# Altium PCB PCB1.PcbDoc (part 4 of 8)
Units mil, origin at the board's own origin, x right, y up, seen from the top; angles counter-clockwise.
Board outline 3820 x 2600 mil, 2 copper layers (Top Layer, Bottom Layer); 88 components, 130 nets, 566 pads, 113 vias.
Unrouted connection lines stored in the file: 16.
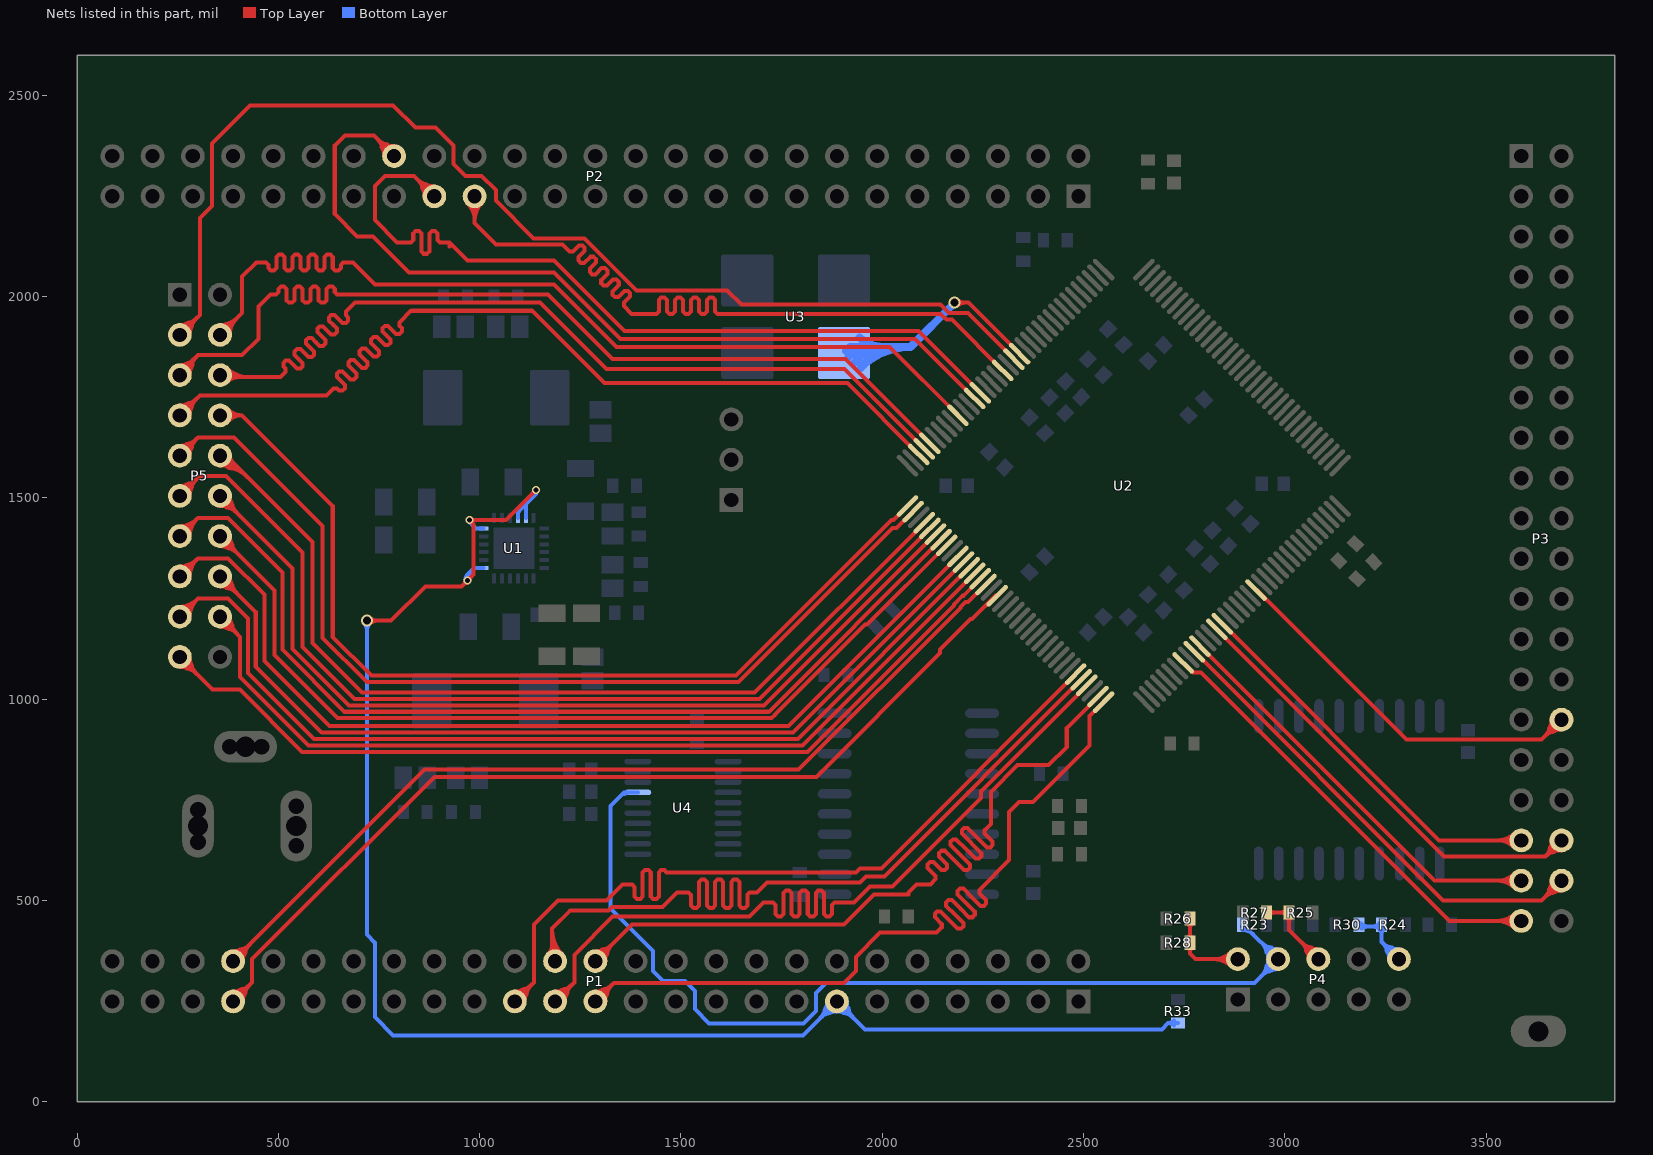
[diagram p4: the nets of this part, all layers, seen from the top]

## Via types
v1: diameter 30, hole 20, Top Layer to Bottom Layer, 74 vias
v2: diameter 20, hole 12, Top Layer to Bottom Layer, 36 vias
v3: diameter 17.72, hole 11.81, Top Layer to Bottom Layer, 3 vias

## Nets (pads, with @x,y where several pads share a name; then routed paths per layer and width w, separated by ;. In a path a pad name is that pad's centre, name@x,y a point inside that pad or via, vN(x,y) a via of type N, cw(c..) or ccw(c..) an arc to the next point about the centre after c; other vN are vias at no path point) (continued)
ADC2_D11: P3.30 U2.129 | length 1655.3
  Top Layer w10: U2.129@2928.5,1271.1 2931.58,1271.1 3302.68,900 3638.19,900 P3.30@3687.4,949.21 ; U2.129@2949.38,1249.31 cw(c2949.38,1239.68) 2956.19,1246.49 ; U2.129@2949.38,1249.31 cw(c2949.38,1239.68) 2956.19,1246.49 ; U2.129@2949.38,1249.31 cw(c2949.38,1239.68) 2956.19,1246.49 ; 3645.53,907.34 cw(c3687.4,865.47) P3.30@3687.4,924.68 ; 3645.53,907.34 ccw(c3603.66,949.21) P3.30@3662.87,949.21 ; 3645.53,907.34 cw(c3687.4,865.47) P3.30@3687.4,924.68 ; 3645.53,907.34 ccw(c3603.66,949.21) P3.30@3662.87,949.21 ; 3645.53,907.34 ccw(c3603.66,949.21) P3.30@3662.87,949.21 ; 3645.53,907.34 cw(c3687.4,865.47) P3.30@3687.4,924.68 ; 3656.89,926.86 cw(c3694.02,916.92) P3.30@3686.3,954.57 ; 3656.89,926.86 cw(c3694.02,916.92) P3.30@3686.3,954.57 ; 3656.89,926.86 cw(c3694.02,916.92) P3.30@3686.3,954.57 ; 3662.6,924.41 cw(c3687.4,899.61) P3.30@3687.4,934.68 ; 3662.6,924.41 ccw(c3637.8,949.21) P3.30@3672.87,949.21 ; 3662.6,924.41 cw(c3687.4,899.61) P3.30@3687.4,934.68 ; 3662.6,924.41 ccw(c3637.8,949.21) P3.30@3672.87,949.21 ; 3662.6,924.41 ccw(c3637.8,949.21) P3.30@3672.87,949.21 ; 3662.6,924.41 cw(c3687.4,899.61) P3.30@3687.4,934.68 ; 3665.05,918.7 ccw(c3655.11,955.83) P3.30@3692.76,948.11 ; 3665.05,918.7 ccw(c3655.11,955.83) P3.30@3692.76,948.11 ; 3665.05,918.7 ccw(c3655.11,955.83) P3.30@3692.76,948.11
ADC2_D12: P3.35 U2.123 | length 1409.7
  Top Layer w10: U2.123@2844.98,1187.58 3383.35,649.21 P3.35@3587.4,649.21 ; 3528.19,649.21 cw(c3528.19,590) P3.35@3570.06,631.87 ; 3528.19,649.21 ccw(c3528.19,708.43) P3.35@3570.06,666.56 ; 3528.19,649.21 cw(c3528.19,590) P3.35@3570.06,631.87 ; 3528.19,649.21 ccw(c3528.19,708.43) P3.35@3570.06,666.56 ; 3528.19,649.21 ccw(c3528.19,708.43) P3.35@3570.06,666.56 ; 3528.19,649.21 cw(c3528.19,590) P3.35@3570.06,631.87 ; 3552.33,649.21 cw(c3552.33,614.14) P3.35@3577.13,638.94 ; 3552.33,649.21 ccw(c3552.33,684.28) P3.35@3577.13,659.48 ; 3552.33,649.21 cw(c3552.33,614.14) P3.35@3577.13,638.94 ; 3552.33,649.21 ccw(c3552.33,684.28) P3.35@3577.13,659.48 ; 3552.33,649.21 ccw(c3552.33,684.28) P3.35@3577.13,659.48 ; 3552.33,649.21 cw(c3552.33,614.14) P3.35@3577.13,638.94
ADC2_D13: P3.36 U2.122 | length 1788.7
  Top Layer w10: U2.122@2831.06,1173.63 3396.01,608.68 3646.87,608.68 P3.36@3687.4,649.21 ; 3646.88,608.69 cw(c3685.55,570.01) P3.36@3686.83,624.69 ; 3646.88,608.69 ccw(c3608.2,647.36) P3.36@3662.88,648.64 ; 3646.88,608.69 cw(c3685.55,570.01) P3.36@3686.83,624.69 ; 3646.88,608.69 ccw(c3608.2,647.36) P3.36@3662.88,648.64 ; 3646.88,608.69 ccw(c3608.2,647.36) P3.36@3662.88,648.64 ; 3646.88,608.69 cw(c3685.55,570.01) P3.36@3686.83,624.69 ; 3657.2,625.25 cw(c3696.05,615.8) P3.36@3686.03,654.51 ; 3657.2,625.25 cw(c3696.05,615.8) P3.36@3686.03,654.51 ; 3657.2,625.25 cw(c3696.05,615.8) P3.36@3686.03,654.51 ; 3663.4,625.21 cw(c3686.31,602.3) P3.36@3687.06,634.69 ; 3663.4,625.21 ccw(c3640.49,648.12) P3.36@3672.88,648.87 ; 3663.4,625.21 cw(c3686.31,602.3) P3.36@3687.06,634.69 ; 3663.4,625.21 ccw(c3640.49,648.12) P3.36@3672.88,648.87 ; 3663.4,625.21 ccw(c3640.49,648.12) P3.36@3672.88,648.87 ; 3663.4,625.21 cw(c3686.31,602.3) P3.36@3687.06,634.69 ; 3663.44,619.01 ccw(c3653.99,657.86) P3.36@3692.7,647.84 ; 3663.44,619.01 ccw(c3653.99,657.86) P3.36@3692.7,647.84 ; 3663.44,619.01 ccw(c3653.99,657.86) P3.36@3692.7,647.84
ADC2_D14: P3.37 U2.119 | length 1483.8
  Top Layer w10: U2.119@2789.3,1131.9 3372,549.21 P3.37@3587.4,549.21 ; 3528.19,549.21 cw(c3528.19,490) P3.37@3570.06,531.87 ; 3528.19,549.21 ccw(c3528.19,608.43) P3.37@3570.06,566.56 ; 3528.19,549.21 cw(c3528.19,490) P3.37@3570.06,531.87 ; 3528.19,549.21 ccw(c3528.19,608.43) P3.37@3570.06,566.56 ; 3528.19,549.21 ccw(c3528.19,608.43) P3.37@3570.06,566.56 ; 3528.19,549.21 cw(c3528.19,490) P3.37@3570.06,531.87 ; 3552.33,549.21 cw(c3552.33,514.14) P3.37@3577.13,538.94 ; 3552.33,549.21 ccw(c3552.33,584.28) P3.37@3577.13,559.48 ; 3552.33,549.21 cw(c3552.33,514.14) P3.37@3577.13,538.94 ; 3552.33,549.21 ccw(c3552.33,584.28) P3.37@3577.13,559.48 ; 3552.33,549.21 ccw(c3552.33,584.28) P3.37@3577.13,559.48 ; 3552.33,549.21 cw(c3552.33,514.14) P3.37@3577.13,538.94
ADC2_D15: P3.38 U2.118 | length 1888
  Top Layer w10: U2.118@2775.38,1117.98 3393.37,500 3638.19,500 P3.38@3687.4,549.21 ; 3645.53,507.34 cw(c3687.4,465.47) P3.38@3687.4,524.68 ; 3645.53,507.34 ccw(c3603.66,549.21) P3.38@3662.87,549.21 ; 3645.53,507.34 cw(c3687.4,465.47) P3.38@3687.4,524.68 ; 3645.53,507.34 ccw(c3603.66,549.21) P3.38@3662.87,549.21 ; 3645.53,507.34 ccw(c3603.66,549.21) P3.38@3662.87,549.21 ; 3645.53,507.34 cw(c3687.4,465.47) P3.38@3687.4,524.68 ; 3656.89,526.86 cw(c3694.02,516.92) P3.38@3686.3,554.57 ; 3656.89,526.86 cw(c3694.02,516.92) P3.38@3686.3,554.57 ; 3656.89,526.86 cw(c3694.02,516.92) P3.38@3686.3,554.57 ; 3662.6,524.41 cw(c3687.4,499.61) P3.38@3687.4,534.68 ; 3662.6,524.41 ccw(c3637.8,549.21) P3.38@3672.87,549.21 ; 3662.6,524.41 cw(c3687.4,499.61) P3.38@3687.4,534.68 ; 3662.6,524.41 ccw(c3637.8,549.21) P3.38@3672.87,549.21 ; 3662.6,524.41 ccw(c3637.8,549.21) P3.38@3672.87,549.21 ; 3662.6,524.41 cw(c3687.4,499.61) P3.38@3687.4,534.68 ; 3665.05,518.7 ccw(c3655.11,555.83) P3.38@3692.76,548.11 ; 3665.05,518.7 ccw(c3655.11,555.83) P3.38@3692.76,548.11 ; 3665.05,518.7 ccw(c3655.11,555.83) P3.38@3692.76,548.11
ADC2_OF: P3.39 U2.116 | length 1578.8
  Top Layer w10: U2.116@2747.55,1090.15 2771.41,1066.28 2791.96,1066.28 3409.03,449.21 P3.39@3587.4,449.21 ; U2.116@2769.07,1069.91 ccw(c2777.82,1078.66) 2777.82,1066.28 ; U2.116@2769.07,1069.91 ccw(c2777.82,1078.66) 2777.82,1066.28 ; U2.116@2769.07,1069.91 ccw(c2777.82,1078.66) 2777.82,1066.28 ; 3528.19,449.21 cw(c3528.19,390) P3.39@3570.06,431.87 ; 3528.19,449.21 ccw(c3528.19,508.43) P3.39@3570.06,466.56 ; 3528.19,449.21 cw(c3528.19,390) P3.39@3570.06,431.87 ; 3528.19,449.21 ccw(c3528.19,508.43) P3.39@3570.06,466.56 ; 3528.19,449.21 ccw(c3528.19,508.43) P3.39@3570.06,466.56 ; 3528.19,449.21 cw(c3528.19,390) P3.39@3570.06,431.87 ; 3552.33,449.21 cw(c3552.33,414.14) P3.39@3577.13,438.94 ; 3552.33,449.21 ccw(c3552.33,484.28) P3.39@3577.13,459.48 ; 3552.33,449.21 cw(c3552.33,414.14) P3.39@3577.13,438.94 ; 3552.33,449.21 ccw(c3552.33,484.28) P3.39@3577.13,459.48 ; 3552.33,449.21 ccw(c3552.33,484.28) P3.39@3577.13,459.48 ; 3552.33,449.21 cw(c3552.33,414.14) P3.39@3577.13,438.94
CLK_OSC: U2.52 U3.3 | length 1770
  Top Layer w10: v1(2180,1985) 2214.6,1985 U2.52@2341.1,1858.5 ; v1@2187.07,1977.93 cw(c2204.14,1960.86) 2204.14,1985 ; v1@2187.07,1977.93 cw(c2204.14,1960.86) 2204.14,1985 ; v1@2187.07,1977.93 cw(c2204.14,1960.86) 2204.14,1985 ; v1@2187.07,1992.07 ccw(c2204.14,2009.14) 2204.14,1985 ; v1@2187.07,1992.07 ccw(c2204.14,2009.14) 2204.14,1985 ; v1@2187.07,1992.07 ccw(c2204.14,2009.14) 2204.14,1985
  Bottom Layer w20: U3.3@1910,1865 1920,1875 2070,1875 ; v1(2180,1985) 2070,1875 ; U3.3@1915.79,1849.58 cw(c1975.71,1791.67) 1975.71,1875 ; U3.3@1915.79,1849.58 cw(c1975.71,1791.67) 1975.71,1875 ; U3.3@1915.79,1849.58 cw(c1975.71,1791.67) 1975.71,1875 ; U3.3@1930.17,1835.68 cw(c2022.85,1746.11) 2022.85,1875 ; U3.3@1930.17,1835.68 cw(c2022.85,1746.11) 2022.85,1875 ; U3.3@1930.17,1835.68 cw(c2022.85,1746.11) 2022.85,1875 ; U3.3@1943.89,1898.89 ccw(c2001.57,1956.57) 2001.57,1875 ; U3.3@1943.89,1898.89 ccw(c2001.57,1956.57) 2001.57,1875 ; U3.3@1943.89,1898.89 ccw(c2001.57,1956.57) 2001.57,1875 ; U3.3@1944.55,1821.78 cw(c2069.99,1700.56) 2069.99,1875 ; U3.3@1944.55,1821.78 cw(c2069.99,1700.56) 2069.99,1875 ; U3.3@1944.55,1821.78 cw(c2069.99,1700.56) 2069.99,1875
DIO_CLK: P5.3 U2.53 | length 3541.8
  Top Layer w10: P5.3@255,1905 305,1955 305,2195 335,2225 335,2380 430,2475 785,2475 840,2420 890,2420 935,2375 935,2330 965,2300 1005,2300 1040,2265 1040,2239.3 1134.3,2145 1260,2145 1390,2015 1615,2015 1650,1980 2145,1980 2166,1959 2212.76,1959 U2.53@2327.18,1844.58 ; P5.3@249.64,1906.1 cw(c287.3,1898.39) 277.35,1935.52 ; P5.3@249.64,1906.1 cw(c287.3,1898.39) 277.35,1935.52 ; P5.3@249.64,1906.1 cw(c287.3,1898.39) 277.35,1935.52 ; P5.3@255,1919.53 ccw(c255,1954.6) 279.8,1929.8 ; P5.3@255,1919.53 ccw(c255,1954.6) 279.8,1929.8 ; P5.3@255,1919.53 ccw(c255,1954.6) 279.8,1929.8 ; P5.3@255,1929.53 ccw(c255,1988.74) 296.87,1946.87 ; P5.3@255,1929.53 ccw(c255,1988.74) 296.87,1946.87 ; P5.3@255,1929.53 ccw(c255,1988.74) 296.87,1946.87 ; P5.3@256.1,1899.64 ccw(c248.39,1937.3) 285.52,1927.35 ; P5.3@256.1,1899.64 ccw(c248.39,1937.3) 285.52,1927.35 ; P5.3@256.1,1899.64 ccw(c248.39,1937.3) 285.52,1927.35 ; P5.3@269.53,1905 cw(c304.6,1905) 279.8,1929.8 ; P5.3@269.53,1905 cw(c304.6,1905) 279.8,1929.8 ; P5.3@269.53,1905 cw(c304.6,1905) 279.8,1929.8 ; P5.3@279.53,1905 cw(c338.74,1905) 296.87,1946.87 ; P5.3@279.53,1905 cw(c338.74,1905) 296.87,1946.87 ; P5.3@279.53,1905 cw(c338.74,1905) 296.87,1946.87
DIO_D0: P5.4 U2.63 | length 2555.3
  Top Layer w10: P5.4@355,1905 410,1960 410,2050 445,2085 469,2085 475,2079 475,2071 481,2065 489,2065 495,2071 495,2099 501,2105 509,2105 515,2099 515,2071 521,2065 529,2065 535,2071 535,2099 541,2105 549,2105 555,2099 555,2071 561,2065 569,2065 575,2071 575,2099 581,2105 589,2105 595,2099 595,2071 601,2065 609,2065 615,2071 615,2099 621,2105 629,2105 635,2099 635,2071 641,2065 649,2065 655,2071 655,2079 661,2085 685,2085 740,2030 1185,2030 1340,1875 2018.37,1875 U2.63@2187.99,1705.38 ; P5.4@355,1919.53 ccw(c355,1954.6) 379.8,1929.8 ccw(c404.6,1905) P5.4@369.53,1905 ; P5.4@355,1929.53 ccw(c355,1988.74) 396.87,1946.87 ccw(c438.74,1905) P5.4@379.53,1905
DIO_D1: P5.5 U2.68 | length 3017
  Top Layer w10: P5.5@247.5,1812.5 257.5,1812.5 300,1855 ; U2.68@2118.39,1635.79 1909.18,1845 1330,1845 1170,2005 646,2005 640,2011 640,2019 634,2025 626,2025 620,2019 620,1991 614,1985 606,1985 600,1991 600,2019 594,2025 586,2025 580,2019 580,1991 574,1985 566,1985 560,1991 560,2019 554,2025 546,2025 540,2019 540,1991 534,1985 526,1985 520,1991 520,2019 514,2025 506,2025 500,2019 500,2011 494,2005 480,2005 450,1975 450,1895 410,1855 300,1855 ; P5.5@249.57,1805.69 cw(c284.07,1801.32) 275.07,1834.9 ; P5.5@249.57,1805.69 cw(c284.07,1801.32) 275.07,1834.9 ; P5.5@249.57,1805.69 cw(c284.07,1801.32) 275.07,1834.9 ; P5.5@255,1829.53 ccw(c255,1876.67) 288.34,1843.34 ; P5.5@255,1829.53 ccw(c255,1876.67) 288.34,1843.34 ; P5.5@255,1829.53 ccw(c255,1876.67) 288.34,1843.34 ; P5.5@256.51,1799.74 ccw(c244.69,1840.79) 286.02,1829.98 ; P5.5@256.51,1799.74 ccw(c244.69,1840.79) 286.02,1829.98 ; P5.5@256.51,1799.74 ccw(c244.69,1840.79) 286.02,1829.98 ; P5.5@269.53,1805.09 cw(c315.77,1805.37) 283.07,1838.07 ; P5.5@269.53,1805.09 cw(c315.77,1805.37) 283.07,1838.07 ; P5.5@269.53,1805.09 cw(c315.77,1805.37) 283.07,1838.07 ; P5.5@279.53,1805.15 cw(c349.42,1805.58) 300,1855 ; P5.5@279.53,1805.15 cw(c349.42,1805.58) 300,1855 ; P5.5@279.53,1805.15 cw(c349.42,1805.58) 300,1855
DIO_D2: P5.6 U2.69 | length 2428.2
  Top Layer w10: P5.6@360,1800 505,1800 517.83,1812.83 517.83,1821.31 512.17,1826.97 512.17,1835.46 517.83,1841.11 526.31,1841.11 546.11,1821.31 554.6,1821.31 560.25,1826.97 560.25,1835.46 540.46,1855.25 540.46,1863.74 546.11,1869.4 554.6,1869.4 574.4,1849.6 582.88,1849.6 588.54,1855.25 588.54,1863.74 568.74,1883.54 568.74,1892.02 574.4,1897.68 582.88,1897.68 592.78,1887.78 602.68,1877.88 611.17,1877.88 616.82,1883.54 616.82,1892.02 597.02,1911.82 597.02,1920.31 602.68,1925.97 611.17,1925.97 630.97,1906.17 639.45,1906.17 645.11,1911.82 645.11,1920.31 635.21,1930.21 625.31,1940.11 625.31,1948.59 630.97,1954.25 639.45,1954.25 659.25,1934.45 667.74,1934.45 673.39,1940.11 673.39,1948.59 667.73,1954.25 667.73,1962.74 690,1985 1150,1985 1315,1820 1906.34,1820 U2.69@2104.47,1621.87 ; P5.6@365.27,1815.27 ccw(c402.14,1852.14) 402.14,1800 ccw(c402.14,1757.86) P5.6@372.34,1787.66 ; P5.6@372.34,1822.34 ccw(c426.29,1876.29) 426.29,1800
DIO_D3: P5.7 U2.70 | length 3146.4
  Top Layer w10: P5.7@255,1705 305,1755 620,1755 636.97,1771.97 645.46,1771.97 651.11,1766.31 659.6,1766.31 665.25,1771.97 665.25,1780.46 645.46,1800.25 645.46,1808.74 651.11,1814.4 659.6,1814.4 679.4,1794.6 687.88,1794.6 693.54,1800.25 693.54,1808.74 673.74,1828.54 673.74,1837.02 679.4,1842.68 687.88,1842.68 697.78,1832.78 707.68,1822.88 716.17,1822.88 721.82,1828.54 721.82,1837.02 702.02,1856.82 702.02,1865.31 707.68,1870.97 716.17,1870.97 735.97,1851.17 744.45,1851.17 750.11,1856.82 750.11,1865.31 740.21,1875.21 730.31,1885.11 730.31,1893.59 735.97,1899.25 744.45,1899.25 764.25,1879.45 772.74,1879.45 778.39,1885.11 778.39,1893.59 758.59,1913.39 758.59,1921.88 764.25,1927.53 772.74,1927.53 792.53,1907.74 801.02,1907.74 806.68,1913.39 806.68,1921.88 801.02,1927.53 801.02,1936.02 830,1965 1130,1965 1310,1785 1913.5,1785 U2.70@2090.55,1607.95 ; P5.7@249.64,1706.1 cw(c287.3,1698.39) 277.35,1735.52 ; P5.7@249.64,1706.1 cw(c287.3,1698.39) 277.35,1735.52 ; P5.7@249.64,1706.1 cw(c287.3,1698.39) 277.35,1735.52 ; P5.7@255,1719.53 ccw(c255,1754.6) 279.8,1729.8 ; P5.7@255,1719.53 ccw(c255,1754.6) 279.8,1729.8 ; P5.7@255,1719.53 ccw(c255,1754.6) 279.8,1729.8 ; P5.7@255,1729.53 ccw(c255,1788.74) 296.87,1746.87 ; P5.7@255,1729.53 ccw(c255,1788.74) 296.87,1746.87 ; P5.7@255,1729.53 ccw(c255,1788.74) 296.87,1746.87 ; P5.7@256.1,1699.64 ccw(c248.39,1737.3) 285.52,1727.35 ; P5.7@256.1,1699.64 ccw(c248.39,1737.3) 285.52,1727.35 ; P5.7@256.1,1699.64 ccw(c248.39,1737.3) 285.52,1727.35 ; P5.7@269.53,1705 cw(c304.6,1705) 279.8,1729.8 ; P5.7@269.53,1705 cw(c304.6,1705) 279.8,1729.8 ; P5.7@269.53,1705 cw(c304.6,1705) 279.8,1729.8 ; P5.7@279.53,1705 cw(c338.74,1705) 296.87,1746.87 ; P5.7@279.53,1705 cw(c338.74,1705) 296.87,1746.87 ; P5.7@279.53,1705 cw(c338.74,1705) 296.87,1746.87
DIO_D4: P5.8 U2.73 | length 2604.3
  Top Layer w10: P5.8@355,1705 410,1705 ; U2.73@2062.71,1479.89 2027.82,1445 2022.67,1445 1636.26,1058.59 731.41,1058.59 635,1155 635,1480 410,1705 ; 387.57,1705 cw(c387.57,1734.26) 365.81,1714.71 ccw(c387.57,1734.26) 387.57,1705 ; 387.57,1705 ccw(c387.57,1675.74) 365.81,1695.29 cw(c387.57,1675.74) 387.57,1705 ; 410,1705 cw(c410,1754.39) 373.25,1721.39 ccw(c410,1754.39) 410,1705 ; 410,1705 ccw(c410,1655.61) 373.25,1688.61 cw(c410,1655.61) 410,1705
DIO_D5: P5.9 U2.74 | length 2811.3
  Top Layer w10: P5.9@249.64,1606.1 cw(c287.3,1598.39) 277.35,1635.52 ; P5.9@255,1605 300,1650 390,1650 610,1430 610,1152.16 719.57,1042.59 1642.89,1042.59 2025.3,1425 2035.66,1425 U2.74@2076.63,1465.97 ; P5.9@256.1,1599.64 ccw(c248.39,1637.3) 285.52,1627.35 ; 279.8,1629.8 cw(c255,1654.6) 255,1619.53 ccw(c255,1654.6) 279.8,1629.8 ; 279.8,1629.8 ccw(c304.6,1605) 269.53,1605 cw(c304.6,1605) 279.8,1629.8 ; 296.87,1646.87 cw(c255,1688.74) 255,1629.53 ccw(c255,1688.74) 296.87,1646.87 ; 296.87,1646.87 ccw(c338.74,1605) 279.53,1605 cw(c338.74,1605) 296.87,1646.87
DIO_D6: P5.10 U2.76 | length 2866.9
  Top Layer w10: P5.10@349.93,1602.95 ccw(c397.46,1622.18) 384.19,1572.65 ; P5.10@354.69,1610.46 cw(c356.29,1582.16) 383.68,1589.49 ; P5.10@355,1605 370,1605 585,1390 585,1140 708.17,1016.83 1683.17,1016.83 U2.76@2104.47,1438.13 ; P5.10@359.2,1606.7 ccw(c420.76,1631.61) 403.57,1567.46 ; P5.10@359.4,1606.07 ccw(c389.62,1613.39) 381.57,1583.35 ; P5.10@355,1580.47 cw(c355,1485.04) 422.48,1552.52 ccw(c355,1485.04) P5.10@355,1580.47 ; P5.10@355,1590.47 cw(c355,1519.19) 405.41,1569.59 ccw(c355,1519.19) P5.10@355,1590.47 ; P5.10@355,1600.47 cw(c355,1553.33) 388.34,1586.66 ccw(c355,1553.33) P5.10@355,1600.47 ; P5.10@379.53,1605 ccw(c402.53,1605) 386.26,1588.74 cw(c402.53,1605) P5.10@379.53,1605
DIO_D7: P5.11 U2.77 | length 2808
  Top Layer w10: P5.11@249.64,1506.1 cw(c287.3,1498.39) 277.35,1535.52 ; P5.11@255,1505 305,1555 370,1555 560,1365 560,1130 689.17,1000.83 1695.01,1000.83 U2.77@2118.39,1424.21 ; P5.11@256.1,1499.64 ccw(c248.39,1537.3) 285.52,1527.35 ; 279.8,1529.8 cw(c255,1554.6) 255,1519.53 ccw(c255,1554.6) 279.8,1529.8 ; 279.8,1529.8 ccw(c304.6,1505) 269.53,1505 cw(c304.6,1505) 279.8,1529.8 ; 296.87,1546.87 cw(c255,1588.74) 255,1529.53 ccw(c255,1588.74) 296.87,1546.87 ; 296.87,1546.87 ccw(c338.74,1505) 279.53,1505 cw(c338.74,1505) 296.87,1546.87
DIO_D8: P5.12 U2.78 | length 2667.5
  Top Layer w10: P5.12@349.64,1503.9 ccw(c387.3,1511.61) 377.35,1474.48 ; P5.12@355,1505 535,1325 535,1125 675.17,984.83 1706.85,984.83 U2.78@2132.31,1410.29 ; P5.12@356.1,1510.36 cw(c348.39,1472.7) 385.52,1482.65 ; 379.8,1480.2 cw(c404.6,1505) 369.53,1505 ccw(c404.6,1505) 379.8,1480.2 ; 379.8,1480.2 ccw(c355,1455.4) 355,1490.47 cw(c355,1455.4) 379.8,1480.2 ; 396.87,1463.13 cw(c438.74,1505) 379.53,1505 ccw(c438.74,1505) 396.87,1463.13 ; 396.87,1463.13 ccw(c355,1421.26) 355,1480.47 cw(c355,1421.26) 396.87,1463.13
DIO_D9: P5.13 U2.79 | length 2773.8
  Top Layer w10: P5.13@249.7,1406.37 cw(c288.41,1396.36) 278.97,1435.21 ; P5.13@255,1405 300,1450 375,1450 510,1315 510,1123.39 664.56,968.83 1718.12,968.83 2145.66,1396.37 U2.79@2146.23,1396.37 ; P5.13@255,1419.53 ccw(c255,1454.6) 279.8,1429.8 ccw(c304.6,1405) P5.13@269.53,1405 ; P5.13@255,1429.53 ccw(c255,1488.74) 296.87,1446.87 ccw(c338.74,1405) P5.13@279.53,1405 ; P5.13@255.34,1419.52 ccw(c256.1,1451.91) 279,1429 ccw(c301.91,1406.1) P5.13@269.52,1405.34 ; P5.13@255.57,1429.52 ccw(c256.85,1484.2) 295.53,1445.53 ccw(c334.2,1406.85) P5.13@279.52,1405.57 ; P5.13@256.37,1399.7 ccw(c246.36,1438.41) 285.21,1428.97
DIO_D10: P5.14 U2.80 | length 2645.8
  Top Layer w10: P5.14@349.64,1403.9 ccw(c387.3,1411.61) 377.35,1374.48 ; P5.14@355,1405 490,1270 490,1110 647.17,952.83 1725.31,952.83 1733.63,961.15 1733.63,961.72 1956.92,1185 1962.69,1185 U2.80@2160.15,1382.45 ; P5.14@356.1,1410.36 cw(c348.39,1372.7) 385.52,1382.65 ; 379.8,1380.2 cw(c404.6,1405) 369.53,1405 ccw(c404.6,1405) 379.8,1380.2 ; 379.8,1380.2 ccw(c355,1355.4) 355,1390.47 cw(c355,1355.4) 379.8,1380.2 ; 396.87,1363.13 cw(c438.74,1405) 379.53,1405 ccw(c438.74,1405) 396.87,1363.13 ; 396.87,1363.13 ccw(c355,1321.26) 355,1380.47 cw(c355,1321.26) 396.87,1363.13
DIO_D11: P5.15 U2.82 | length 2770.7
  Top Layer w10: P5.15@249.7,1306.37 cw(c288.41,1296.36) 278.97,1335.21 ; P5.15@255,1305 300,1350 375,1350 465,1260 465,1095 626.68,933.32 1766.68,933.32 U2.82@2187.99,1354.62 ; P5.15@255,1319.53 ccw(c255,1354.6) 279.8,1329.8 ccw(c304.6,1305) P5.15@269.53,1305 ; P5.15@255,1329.53 ccw(c255,1388.74) 296.87,1346.87 ccw(c338.74,1305) P5.15@279.53,1305 ; P5.15@255.34,1319.52 ccw(c256.1,1351.91) 279,1329 ccw(c301.91,1306.1) P5.15@269.52,1305.34 ; P5.15@255.57,1329.52 ccw(c256.85,1384.2) 295.53,1345.53 ccw(c334.2,1306.85) P5.15@279.52,1305.57 ; P5.15@256.37,1299.7 ccw(c246.36,1338.41) 285.21,1328.97
DIO_D12: P5.16 U2.83 | length 2643.3
  Top Layer w10: P5.16@349.64,1303.9 ccw(c387.3,1311.61) 377.35,1274.48 ; P5.16@355,1305 443.73,1216.27 443.73,1081.27 607.68,917.32 1778.52,917.32 U2.83@2201.9,1340.7 ; P5.16@356.1,1310.36 cw(c348.39,1272.7) 385.52,1282.65 ; 379.8,1280.2 cw(c404.6,1305) 369.53,1305 ccw(c404.6,1305) 379.8,1280.2 ; 379.8,1280.2 ccw(c355,1255.4) 355,1290.47 cw(c355,1255.4) 379.8,1280.2 ; 396.87,1263.13 cw(c438.74,1305) 379.53,1305 ccw(c438.74,1305) 396.87,1263.13 ; 396.87,1263.13 ccw(c355,1221.26) 355,1280.47 cw(c355,1221.26) 396.87,1263.13
DIO_D13: P5.17 U2.84 | length 2754.5
  Top Layer w10: P5.17@249.7,1206.37 cw(c288.41,1196.36) 278.97,1235.21 ; P5.17@255,1205 300,1250 375,1250 425,1200 425,1065 588.68,901.32 1790.36,901.32 U2.84@2215.82,1326.78 ; P5.17@255,1219.53 ccw(c255,1254.6) 279.8,1229.8 ccw(c304.6,1205) P5.17@269.53,1205 ; P5.17@255,1229.53 ccw(c255,1288.74) 296.87,1246.87 ccw(c338.74,1205) P5.17@279.53,1205 ; P5.17@255.34,1219.52 ccw(c256.1,1251.91) 279,1229 ccw(c301.91,1206.1) P5.17@269.52,1205.34 ; P5.17@255.57,1229.52 ccw(c256.85,1284.2) 295.53,1245.53 ccw(c334.2,1206.85) P5.17@279.52,1205.57 ; P5.17@256.37,1199.7 ccw(c246.36,1238.41) 285.21,1228.97
DIO_D14: P5.18 U2.85 | length 2624.1
  Top Layer w10: P5.18@349.64,1203.9 ccw(c387.3,1211.61) 377.35,1174.48 ; P5.18@355,1205 405,1155 405,1055 574.68,885.32 1802.2,885.32 U2.85@2229.74,1312.86 ; P5.18@356.1,1210.36 cw(c348.39,1172.7) 385.52,1182.65 ; 379.8,1180.2 cw(c404.6,1205) 369.53,1205 ccw(c404.6,1205) 379.8,1180.2 ; 379.8,1180.2 ccw(c355,1155.4) 355,1190.47 cw(c355,1155.4) 379.8,1180.2 ; 396.87,1163.13 cw(c438.74,1205) 379.53,1205 ccw(c438.74,1205) 396.87,1163.13 ; 396.87,1163.13 ccw(c355,1121.26) 355,1180.47 cw(c355,1121.26) 396.87,1163.13
DIO_D15: P5.19 U2.86 | length 2646.8
  Top Layer w10: P5.19@249.64,1103.9 ccw(c287.3,1111.61) 277.35,1074.48 ; P5.19@255,1105 335.95,1024.05 404.05,1024.05 558.78,869.32 1814.04,869.32 2178,1233.28 2178,1235.33 2199.67,1257 2201.72,1257 U2.86@2243.66,1298.94 ; P5.19@256.1,1110.36 cw(c248.39,1072.7) 285.52,1082.65 ; 279.8,1080.2 cw(c304.6,1105) 269.53,1105 ccw(c304.6,1105) 279.8,1080.2 ; 279.8,1080.2 ccw(c255,1055.4) 255,1090.47 cw(c255,1055.4) 279.8,1080.2 ; 296.87,1063.13 cw(c338.74,1105) 279.53,1105 ccw(c338.74,1105) 296.87,1063.13 ; 296.87,1063.13 ccw(c255,1021.26) 255,1080.47 cw(c255,1021.26) 296.87,1063.13
EN_POW: P1.13 R33.2 U1.7 U1.12 U1.16 U1.17 | length 5811.1
  Top Layer w10: v1(720,1195) 780,1195 865,1280 955,1280 v2(970,1295) 984.86,1309.86 984.86,1435.14 v2(975,1445) 1065,1445 v2(1140,1520) ; 744.14,1195 cw(c744.14,1219.14) 727.07,1202.07 ccw(c744.14,1219.14) 744.14,1195 ; 744.14,1195 ccw(c744.14,1170.86) 727.07,1187.93 cw(c744.14,1170.86) 744.14,1195 ; 961.46,1286.46 cw(c970,1277.93) v2@970,1290 ; 961.46,1286.46 ccw(c952.93,1295) v2@965,1295 ; 961.46,1286.46 cw(c970,1277.93) v2@970,1290 ; 961.46,1286.46 ccw(c952.93,1295) v2@965,1295 ; 961.46,1286.46 ccw(c952.93,1295) v2@965,1295 ; 961.46,1286.46 cw(c970,1277.93) v2@970,1290 ; v2@970,1300 ccw(c970,1312.07) 978.54,1303.54 ; v2@970,1300 ccw(c970,1312.07) 978.54,1303.54 ; v2@970,1300 ccw(c970,1312.07) 978.54,1303.54 ; v2@975,1295 cw(c987.07,1295) 978.54,1303.54 ; v2@975,1295 cw(c987.07,1295) 978.54,1303.54 ; v2@975,1295 cw(c987.07,1295) 978.54,1303.54 ; v2@975,1440 cw(c975,1427.93) 983.54,1436.46 ; v2@975,1440 cw(c975,1427.93) 983.54,1436.46 ; v2@975,1440 cw(c975,1427.93) 983.54,1436.46 ; v2@978.54,1441.46 cw(c987.07,1432.93) 987.07,1445 ; v2@978.54,1441.46 cw(c987.07,1432.93) 987.07,1445 ; v2@978.54,1441.46 cw(c987.07,1432.93) 987.07,1445 ; v2@978.54,1448.54 ccw(c987.07,1457.07) 987.07,1445 ; v2@978.54,1448.54 ccw(c987.07,1457.07) 987.07,1445 ; v2@978.54,1448.54 ccw(c987.07,1457.07) 987.07,1445 ; v2@980,1445 ccw(c992.07,1445) 983.54,1436.46 ; v2@980,1445 ccw(c992.07,1445) 983.54,1436.46 ; v2@980,1445 ccw(c992.07,1445) 983.54,1436.46 ; 1131.46,1511.46 cw(c1140,1502.93) v2@1140,1515 ; 1131.46,1511.46 ccw(c1122.93,1520) v2@1135,1520 ; 1131.46,1511.46 cw(c1140,1502.93) v2@1140,1515 ; 1131.46,1511.46 ccw(c1122.93,1520) v2@1135,1520 ; 1131.46,1511.46 ccw(c1122.93,1520) v2@1135,1520 ; 1131.46,1511.46 cw(c1140,1502.93) v2@1140,1515
  Bottom Layer w10: v1(720,1195) 720,415 740,395 740,210 785,165 1803.19,165 P1.13@1887.4,249.21 1956.61,180 2695,180 2710.47,195.47 ; v2(970,1295) 970,1310 985.79,1325.79 ; v2@974.46,1297.26 cw(c984.74,1302.45) 975.82,1309.75 ; v2(975,1445) 975,1440 990.79,1424.21 U1.12@1010,1424.21 ; U1.7@1010,1325.79 985.79,1325.79 ; U1.16@1094.84,1450 1094.84,1464.84 1114.53,1484.53 ; U1.17@1114.53,1450 1114.53,1484.53 ; 1132.05,1505.22 ccw(c1122.81,1514.45) v2@1135.24,1518.46 ; v2(1140,1520) 1140,1510 1114.53,1484.53 ; 1856.89,226.86 cw(c1894.01,216.92) P1.13@1886.3,254.57 ; 1865.05,218.7 ccw(c1855.1,255.83) P1.13@1892.76,248.11 ; P1.13@1882.04,248.11 ccw(c1919.7,255.83) 1909.75,218.7 ; P1.13@1888.5,254.57 cw(c1880.79,216.92) 1917.92,226.86 ; R33.2@2724.85,189.26 ccw(c2709.87,174.28) 2709.87,195.47 ccw(c2709.87,216.67) R33.2@2724.85,201.68 ; R33.2@2735,195.47 2710.47,195.47 ; 720,1170.86 cw(c744.14,1170.86) 727.07,1187.93 ccw(c744.14,1170.86) 720,1170.86 ; 720,1170.86 ccw(c695.86,1170.86) 712.93,1187.93 cw(c695.86,1170.86) 720,1170.86 ; v2@965.02,1294.5 cw(c985.21,1296.52) 970.87,1310.87 ; v2@965.02,1294.5 cw(c985.21,1296.52) 970.87,1310.87 ; v2@965.02,1294.5 cw(c985.21,1296.52) 970.87,1310.87 ; v2@966.46,1298.54 ccw(c957.93,1307.07) 970,1307.07 ; v2@966.46,1298.54 ccw(c957.93,1307.07) 970,1307.07 ; v2@966.46,1298.54 ccw(c957.93,1307.07) 970,1307.07 ; v2@967.08,1299.06 ccw(c950.41,1322.25) 978.6,1317.64 ; v2@967.08,1299.06 ccw(c950.41,1322.25) 978.6,1317.64 ; v2@967.08,1299.06 ccw(c950.41,1322.25) 978.6,1317.64 ; 970,1307.07 ccw(c982.07,1307.07) v2@973.54,1298.54 ; 970,1307.07 ccw(c982.07,1307.07) v2@973.54,1298.54 ; 970,1307.07 ccw(c982.07,1307.07) v2@973.54,1298.54 ; v2@974.98,1295.5 cw(c1012.34,1299.23) 985.79,1325.79 ; v2@974.98,1295.5 cw(c1012.34,1299.23) 985.79,1325.79 ; v2@974.98,1295.5 cw(c1012.34,1299.23) 985.79,1325.79 ; v2@980,1445 ccw(c1004.14,1445) 987.07,1427.93 ; v2@980,1445 ccw(c1004.14,1445) 987.07,1427.93 ; v2@980,1445 ccw(c1004.14,1445) 987.07,1427.93 ; U1.16@1094.84,1457 cw(c1113.77,1457) 1100.39,1470.39 ; U1.16@1094.84,1457 cw(c1113.77,1457) 1100.39,1470.39 ; U1.16@1094.84,1457 cw(c1113.77,1457) 1100.39,1470.39 ; 1124.39,1494.39 ccw(c1098.79,1520) v2@1135,1520 ; 1124.39,1494.39 ccw(c1098.79,1520) v2@1135,1520 ; 1124.39,1494.39 ccw(c1098.79,1520) v2@1135,1520 ; 1129.19,1498.33 cw(c1156.78,1490.94) v2@1142.5,1515.67 ; 1129.19,1498.33 cw(c1156.78,1490.94) v2@1142.5,1515.67 ; 1129.19,1498.33 cw(c1156.78,1490.94) v2@1142.5,1515.67 ; 1845.53,207.34 cw(c1887.4,165.47) P1.13@1887.4,224.68 ; 1845.53,207.34 ccw(c1803.66,249.21) 1862.87,249.21 cw(c1803.66,249.21) 1845.53,207.34 ; 1845.53,207.34 cw(c1887.4,165.47) P1.13@1887.4,224.68 ; 1862.6,224.41 cw(c1887.4,199.61) P1.13@1887.4,234.68 ; 1862.6,224.41 ccw(c1837.8,249.21) 1872.87,249.21 cw(c1837.8,249.21) 1862.6,224.41 ; 1862.6,224.41 cw(c1887.4,199.61) P1.13@1887.4,234.68 ; P1.13@1887.4,224.68 cw(c1887.4,165.47) 1929.27,207.34 ; P1.13@1887.4,224.68 cw(c1887.4,165.47) 1929.27,207.34 ; P1.13@1887.4,234.68 cw(c1887.4,199.61) 1912.2,224.41 ; P1.13@1887.4,234.68 cw(c1887.4,199.61) 1912.2,224.41 ; 1912.2,224.41 cw(c1937,249.21) 1901.93,249.21 ccw(c1937,249.21) 1912.2,224.41 ; 1929.27,207.34 cw(c1971.14,249.21) 1911.93,249.21 ccw(c1971.14,249.21) 1929.27,207.34 ; 2710.47,195.47 cw(c2710.47,175.72) 2724.73,189.39 ccw(c2710.47,175.72) 2710.47,195.47 ; 2710.47,195.47 ccw(c2710.47,215.22) 2724.73,201.55 cw(c2710.47,215.22) 2710.47,195.47
ETCK: P4.2 R26.2 R28.2 | length 955.5
  Top Layer w10: R26.2@2764.53,455 R28.2@2764.53,395 2764.53,368.15 2778.46,354.21 P4.2@2883.46,354.21 ; R28.2@2758.32,384.85 cw(c2743.33,369.87) 2764.53,369.87 ; R28.2@2758.32,384.85 cw(c2743.33,369.87) 2764.53,369.87 ; R28.2@2758.32,384.85 cw(c2743.33,369.87) 2764.53,369.87 ; R28.2@2758.32,405.15 ccw(c2743.33,420.13) 2764.53,420.13 ; R28.2@2758.32,405.15 ccw(c2743.33,420.13) 2764.53,420.13 ; R28.2@2758.32,405.15 ccw(c2743.33,420.13) 2764.53,420.13 ; R26.2@2758.32,444.85 cw(c2743.33,429.87) 2764.53,429.87 ; R26.2@2758.32,444.85 cw(c2743.33,429.87) 2764.53,429.87 ; R26.2@2758.32,444.85 cw(c2743.33,429.87) 2764.53,429.87 ; 2764.53,369.87 cw(c2785.72,369.87) R28.2@2770.74,384.85 ; 2764.53,369.87 cw(c2785.72,369.87) R28.2@2770.74,384.85 ; 2764.53,369.87 cw(c2785.72,369.87) R28.2@2770.74,384.85 ; 2764.53,420.13 ccw(c2785.72,420.13) R28.2@2770.74,405.15 ; 2764.53,420.13 ccw(c2785.72,420.13) R28.2@2770.74,405.15 ; 2764.53,420.13 ccw(c2785.72,420.13) R28.2@2770.74,405.15 ; 2764.53,429.87 cw(c2785.72,429.87) R26.2@2770.74,444.85 ; 2764.53,429.87 cw(c2785.72,429.87) R26.2@2770.74,444.85 ; 2764.53,429.87 cw(c2785.72,429.87) R26.2@2770.74,444.85 ; 2824.25,354.21 cw(c2824.25,295) P4.2@2866.12,336.87 ; 2824.25,354.21 ccw(c2824.25,413.43) P4.2@2866.12,371.56 ; 2824.25,354.21 cw(c2824.25,295) P4.2@2866.12,336.87 ; 2824.25,354.21 ccw(c2824.25,413.43) P4.2@2866.12,371.56 ; 2824.25,354.21 ccw(c2824.25,413.43) P4.2@2866.12,371.56 ; 2824.25,354.21 cw(c2824.25,295) P4.2@2866.12,336.87 ; 2848.39,354.21 cw(c2848.39,319.14) P4.2@2873.19,343.94 ; 2848.39,354.21 ccw(c2848.39,389.28) P4.2@2873.19,364.48 ; 2848.39,354.21 cw(c2848.39,319.14) P4.2@2873.19,343.94 ; 2848.39,354.21 ccw(c2848.39,389.28) P4.2@2873.19,364.48 ; 2848.39,354.21 ccw(c2848.39,389.28) P4.2@2873.19,364.48 ; 2848.39,354.21 cw(c2848.39,319.14) P4.2@2873.19,343.94
ETDI: P4.10 R24.2 R30.2 | length 1158
  Bottom Layer w10: R30.2@3184.53,445 3194.53,435 3240.47,435 3240.47,397.2 P4.10@3283.46,354.21 ; R30.2@3190.74,429.85 cw(c3203.16,417.43) 3203.16,435 ; R30.2@3190.74,429.85 cw(c3203.16,417.43) 3203.16,435 ; R30.2@3190.74,429.85 cw(c3203.16,417.43) 3203.16,435 ; R30.2@3190.74,442.27 ccw(c3208.29,459.82) 3208.29,435 ; R30.2@3190.74,442.27 ccw(c3208.29,459.82) 3208.29,435 ; R30.2@3190.74,442.27 ccw(c3208.29,459.82) 3208.29,435 ; 3216.71,435 ccw(c3216.71,459.82) R24.2@3234.26,442.27 ; 3216.71,435 ccw(c3216.71,459.82) R24.2@3234.26,442.27 ; 3216.71,435 ccw(c3216.71,459.82) R24.2@3234.26,442.27 ; 3221.84,435 cw(c3221.84,417.43) R24.2@3234.26,429.85 ; 3221.84,435 cw(c3221.84,417.43) R24.2@3234.26,429.85 ; 3221.84,435 cw(c3221.84,417.43) R24.2@3234.26,429.85 ; R24.2@3234.26,429.85 cw(c3219.28,414.87) 3240.47,414.87 ; R24.2@3234.26,429.85 cw(c3219.28,414.87) 3240.47,414.87 ; R24.2@3234.26,429.85 cw(c3219.28,414.87) 3240.47,414.87 ; 3240.47,414.87 cw(c3261.67,414.87) R24.2@3246.68,429.85 ; 3240.47,414.87 cw(c3261.67,414.87) R24.2@3246.68,429.85 ; 3240.47,414.87 cw(c3261.67,414.87) R24.2@3246.68,429.85 ; 3241.59,396.08 cw(c3199.72,354.21) P4.10@3258.94,354.21 ; 3241.59,396.08 ccw(c3283.46,437.95) P4.10@3283.46,378.74 ; 3241.59,396.08 cw(c3199.72,354.21) P4.10@3258.94,354.21 ; 3241.59,396.08 ccw(c3283.46,437.95) P4.10@3283.46,378.74 ; 3241.59,396.08 ccw(c3283.46,437.95) P4.10@3283.46,378.74 ; 3241.59,396.08 cw(c3199.72,354.21) P4.10@3258.94,354.21 ; 3252.95,376.56 ccw(c3290.08,386.51) P4.10@3282.37,348.85 ; 3252.95,376.56 ccw(c3290.08,386.51) P4.10@3282.37,348.85 ; 3252.95,376.56 ccw(c3290.08,386.51) P4.10@3282.37,348.85 ; 3258.66,379.01 cw(c3233.86,354.21) P4.10@3268.94,354.21 ; 3258.66,379.01 ccw(c3283.46,403.81) P4.10@3283.46,368.74 ; 3258.66,379.01 cw(c3233.86,354.21) P4.10@3268.94,354.21 ; 3258.66,379.01 ccw(c3283.46,403.81) P4.10@3283.46,368.74 ; 3258.66,379.01 ccw(c3283.46,403.81) P4.10@3283.46,368.74 ; 3258.66,379.01 cw(c3233.86,354.21) P4.10@3268.94,354.21 ; 3261.12,384.73 cw(c3251.17,347.6) P4.10@3288.83,355.31 ; 3261.12,384.73 cw(c3251.17,347.6) P4.10@3288.83,355.31 ; 3261.12,384.73 cw(c3251.17,347.6) P4.10@3288.83,355.31
ETDO: P4.4 R23.2 U4.17 | length 3998.3
  Bottom Layer w10: U4.17@1392.8,768.39 1358.39,768.39 1325,735 1325,480 1430,375 1430,325 1455,300 1510,300 1535,275 1535,230 1570,195 1805,195 1835,225 1835,270 1860,295 2924.25,295 P4.4@2983.46,354.21 R23.2@2900.47,437.2 ; 1349.62,759.62 cw(c1366.22,743.02) U4.17@1366.22,766.5 ; 1349.62,759.62 cw(c1366.22,743.02) U4.17@1366.22,766.5 ; 1349.62,759.62 cw(c1366.22,743.02) U4.17@1366.22,766.5 ; 1358.03,764.3 ccw(c1355.24,774.73) U4.17@1364.58,769.33 ; 1358.03,764.3 ccw(c1355.24,774.73) U4.17@1364.58,769.33 ; 1358.03,764.3 ccw(c1355.24,774.73) U4.17@1364.58,769.33 ; R23.2@2894.35,435.58 ccw(c2913,443.6) R23.2@2907.74,424 ; R23.2@2894.35,435.58 ccw(c2913,443.6) R23.2@2907.74,424 ; R23.2@2894.35,435.58 ccw(c2913,443.6) R23.2@2907.74,424 ; R23.2@2895.47,427.28 cw(c2895.47,391.26) 2920.94,416.73 ; R23.2@2895.47,427.28 cw(c2895.47,391.26) 2920.94,416.73 ; R23.2@2895.47,427.28 cw(c2895.47,391.26) 2920.94,416.73 ; 2941.59,312.34 cw(c2983.46,270.47) P4.4@2983.46,329.68 ; 2941.59,312.34 ccw(c2899.72,354.21) P4.4@2958.94,354.21 ; 2941.59,312.34 cw(c2983.46,270.47) P4.4@2983.46,329.68 ; 2941.59,312.34 ccw(c2899.72,354.21) P4.4@2958.94,354.21 ; 2941.59,312.34 ccw(c2899.72,354.21) P4.4@2958.94,354.21 ; 2941.59,312.34 cw(c2983.46,270.47) P4.4@2983.46,329.68 ; 2941.59,396.08 cw(c2899.72,354.21) P4.4@2958.94,354.21 ; 2941.59,396.08 ccw(c2983.46,437.95) P4.4@2983.46,378.74 ; 2941.59,396.08 cw(c2899.72,354.21) P4.4@2958.94,354.21 ; 2941.59,396.08 ccw(c2983.46,437.95) P4.4@2983.46,378.74 ; 2941.59,396.08 ccw(c2983.46,437.95) P4.4@2983.46,378.74 ; 2941.59,396.08 cw(c2899.72,354.21) P4.4@2958.94,354.21 ; 2952.95,331.86 cw(c2990.08,321.92) P4.4@2982.37,359.57 ; 2952.95,331.86 cw(c2990.08,321.92) P4.4@2982.37,359.57 ; 2952.95,331.86 cw(c2990.08,321.92) P4.4@2982.37,359.57 ; 2952.95,376.56 ccw(c2990.08,386.51) P4.4@2982.37,348.85 ; 2952.95,376.56 ccw(c2990.08,386.51) P4.4@2982.37,348.85 ; 2952.95,376.56 ccw(c2990.08,386.51) P4.4@2982.37,348.85 ; 2958.66,329.41 cw(c2983.46,304.61) P4.4@2983.46,339.68 ; 2958.66,329.41 ccw(c2933.86,354.21) P4.4@2968.94,354.21 ; 2958.66,329.41 cw(c2983.46,304.61) P4.4@2983.46,339.68 ; 2958.66,329.41 ccw(c2933.86,354.21) P4.4@2968.94,354.21 ; 2958.66,329.41 ccw(c2933.86,354.21) P4.4@2968.94,354.21 ; 2958.66,329.41 cw(c2983.46,304.61) P4.4@2983.46,339.68 ; 2958.66,379.01 cw(c2933.86,354.21) P4.4@2968.94,354.21 ; 2958.66,379.01 ccw(c2983.46,403.81) P4.4@2983.46,368.74 ; 2958.66,379.01 cw(c2933.86,354.21) P4.4@2968.94,354.21 ; 2958.66,379.01 ccw(c2983.46,403.81) P4.4@2983.46,368.74 ; 2958.66,379.01 ccw(c2983.46,403.81) P4.4@2983.46,368.74 ; 2958.66,379.01 cw(c2933.86,354.21) P4.4@2968.94,354.21 ; 2961.12,323.7 ccw(c2951.17,360.83) P4.4@2988.83,353.11 ; 2961.12,323.7 ccw(c2951.17,360.83) P4.4@2988.83,353.11 ; 2961.12,323.7 ccw(c2951.17,360.83) P4.4@2988.83,353.11 ; 2961.12,384.73 cw(c2951.17,347.6) P4.4@2988.83,355.31 ; 2961.12,384.73 cw(c2951.17,347.6) P4.4@2988.83,355.31 ; 2961.12,384.73 cw(c2951.17,347.6) P4.4@2988.83,355.31
ETMS: P4.6 R25.2 R27.2 | length 1201.2
  Top Layer w10: R27.2@2954.53,470 R25.2@3010.47,470 3010.47,427.2 P4.6@3083.46,354.21 ; R27.2@2960.74,463.79 cw(c2975.72,448.8) 2975.72,470 ; R27.2@2960.74,463.79 cw(c2975.72,448.8) 2975.72,470 ; R27.2@2960.74,463.79 cw(c2975.72,448.8) 2975.72,470 ; R27.2@2960.74,476.21 ccw(c2975.72,491.2) 2975.72,470 ; R27.2@2960.74,476.21 ccw(c2975.72,491.2) 2975.72,470 ; R27.2@2960.74,476.21 ccw(c2975.72,491.2) 2975.72,470 ; 2989.28,470 cw(c2989.28,448.8) R25.2@3004.26,463.79 ; 2989.28,470 ccw(c2989.28,491.2) R25.2@3004.26,476.21 ; 2989.28,470 cw(c2989.28,448.8) R25.2@3004.26,463.79 ; 2989.28,470 ccw(c2989.28,491.2) R25.2@3004.26,476.21 ; 2989.28,470 ccw(c2989.28,491.2) R25.2@3004.26,476.21 ; 2989.28,470 cw(c2989.28,448.8) R25.2@3004.26,463.79 ; R25.2@3004.26,459.85 cw(c2989.28,444.87) 3010.47,444.87 ; R25.2@3004.26,459.85 cw(c2989.28,444.87) 3010.47,444.87 ; R25.2@3004.26,459.85 cw(c2989.28,444.87) 3010.47,444.87 ; 3010.47,444.87 cw(c3031.67,444.87) R25.2@3016.68,459.85 ; 3010.47,444.87 cw(c3031.67,444.87) R25.2@3016.68,459.85 ; 3010.47,444.87 cw(c3031.67,444.87) R25.2@3016.68,459.85 ; 3041.59,396.08 cw(c2999.72,354.21) P4.6@3058.94,354.21 ; 3041.59,396.08 ccw(c3083.46,437.95) P4.6@3083.46,378.74 ; 3041.59,396.08 cw(c2999.72,354.21) P4.6@3058.94,354.21 ; 3041.59,396.08 ccw(c3083.46,437.95) P4.6@3083.46,378.74 ; 3041.59,396.08 ccw(c3083.46,437.95) P4.6@3083.46,378.74 ; 3041.59,396.08 cw(c2999.72,354.21) P4.6@3058.94,354.21 ; 3052.95,376.56 ccw(c3090.08,386.51) P4.6@3082.37,348.85 ; 3052.95,376.56 ccw(c3090.08,386.51) P4.6@3082.37,348.85 ; 3052.95,376.56 ccw(c3090.08,386.51) P4.6@3082.37,348.85 ; 3058.66,379.01 cw(c3033.86,354.21) P4.6@3068.94,354.21 ; 3058.66,379.01 ccw(c3083.46,403.81) P4.6@3083.46,368.74 ; 3058.66,379.01 cw(c3033.86,354.21) P4.6@3068.94,354.21 ; 3058.66,379.01 ccw(c3083.46,403.81) P4.6@3083.46,368.74 ; 3058.66,379.01 ccw(c3083.46,403.81) P4.6@3083.46,368.74 ; 3058.66,379.01 cw(c3033.86,354.21) P4.6@3068.94,354.21 ; 3061.12,384.73 cw(c3051.17,347.6) P4.6@3088.83,355.31 ; 3061.12,384.73 cw(c3051.17,347.6) P4.6@3088.83,355.31 ; 3061.12,384.73 cw(c3051.17,347.6) P4.6@3088.83,355.31
FSMC_CLK: P2.31 U2.55 | length 2502.9
  Top Layer w10: P2.31@987.4,2249.21 987.4,2182.6 1041,2129 1206,2129 1222.83,2112.17 1231.31,2112.17 1246.52,2127.37 1255,2127.37 1260.66,2121.72 1260.66,2113.23 1245.46,2098.03 1245.46,2089.54 1251.11,2083.89 1259.6,2083.89 1274.8,2099.09 1283.29,2099.09 1288.94,2093.43 1288.94,2084.95 1273.74,2069.75 1273.74,2061.26 1279.4,2055.6 1287.88,2055.6 1303.08,2070.81 1311.57,2070.81 1317.23,2065.15 1317.23,2056.66 1302.02,2041.46 1302.02,2032.98 1307.68,2027.32 1316.17,2027.32 1331.37,2042.52 1339.85,2042.52 1345.51,2036.86 1345.51,2028.38 1330.31,2013.18 1330.31,2004.69 1335.97,1999.03 1344.45,1999.03 1359.65,2014.24 1368.14,2014.24 1373.8,2008.58 1373.8,2000.09 1358.59,1984.89 1358.59,1976.41 1377.68,1957.32 1439,1957.32 1445,1963.32 1445,1991.32 1451,1997.32 1459,1997.32 1465,1991.32 1465,1963.32 1471,1957.32 1479,1957.32 1485,1963.32 1485,1991.32 1491,1997.32 1499,1997.32 1505,1991.32 1505,1963.32 1511,1957.32 1519,1957.32 1525,1963.32 1525,1991.32 1531,1997.32 1539,1997.32 1545,1991.32 1545,1963.32 1551,1957.32 1559,1957.32 1565,1963.32 1565,1991.32 1571,1997.32 1579,1997.32 1585,1991.32 1585,1963.32 1591,1957.32 2145.06,1957.32 2159.37,1943 2173.08,1943 U2.55@2299.34,1816.74 ; P2.31@970.06,2231.87 cw(c928.19,2190) 987.4,2190 ; P2.31@970.06,2231.87 cw(c928.19,2190) 987.4,2190 ; P2.31@970.06,2231.87 cw(c928.19,2190) 987.4,2190 ; P2.31@977.13,2238.94 cw(c952.33,2214.14) 987.4,2214.14 ; P2.31@977.13,2238.94 cw(c952.33,2214.14) 987.4,2214.14 ; P2.31@977.13,2238.94 cw(c952.33,2214.14) 987.4,2214.14 ; 987.4,2190 cw(c1046.62,2190) P2.31@1004.74,2231.87 ; 987.4,2190 cw(c1046.62,2190) P2.31@1004.74,2231.87 ; 987.4,2190 cw(c1046.62,2190) P2.31@1004.74,2231.87 ; 987.4,2214.14 cw(c1022.47,2214.14) P2.31@997.67,2238.94 ; 987.4,2214.14 cw(c1022.47,2214.14) P2.31@997.67,2238.94 ; 987.4,2214.14 cw(c1022.47,2214.14) P2.31@997.67,2238.94
FSMC_D0: P1.43 U2.89 | length 2752.6
  Top Layer w10: P1.43@382.04,250.31 cw(c419.7,242.6) 409.75,279.73 ; P1.43@387.4,249.21 435,296.81 435,354.13 887.87,807 1836.7,807 2144,1114.3 2144,1123.4 2219.29,1198.69 2223.38,1198.69 2281.88,1257.18 U2.89@2285.42,1257.18 ; P1.43@388.5,243.85 ccw(c380.79,281.51) 417.92,271.56 ; 412.2,274.01 cw(c387.4,298.81) 387.4,263.74 ccw(c387.4,298.81) 412.2,274.01 ; 412.2,274.01 ccw(c437,249.21) 401.93,249.21 cw(c437,249.21) 412.2,274.01 ; 429.27,291.08 cw(c387.4,332.95) 387.4,273.74 ccw(c387.4,332.95) 429.27,291.08 ; 429.27,291.08 ccw(c471.14,249.21) 411.93,249.21 cw(c471.14,249.21) 429.27,291.08 ; 2256.95,1232.25 cw(c2264.54,1224.65) 2264.54,1235.4 ccw(c2264.54,1224.65) 2256.95,1232.25
FSMC_D1: P1.44 U2.87 | length 2640.3
  Top Layer w10: P1.44@382.04,350.31 cw(c419.7,342.6) 409.75,379.73 ; P1.44@387.4,349.21 863.19,825 1792.35,825 2194,1226.65 2194,1228.7 2206.3,1241 2213.56,1241 U2.87@2257.58,1285.02 ; P1.44@388.5,343.85 ccw(c380.79,381.51) 417.92,371.56 ; 412.2,374.01 cw(c387.4,398.81) 387.4,363.74 ccw(c387.4,398.81) 412.2,374.01 ; 412.2,374.01 ccw(c437,349.21) 401.93,349.21 cw(c437,349.21) 412.2,374.01 ; 429.27,391.08 cw(c387.4,432.95) 387.4,373.74 ccw(c387.4,432.95) 429.27,391.08 ; 429.27,391.08 ccw(c471.14,349.21) 411.93,349.21 cw(c471.14,349.21) 429.27,391.08
FSMC_D2: P2.36 U2.60 | length 2828.9
  Top Layer w10: P2.36@788.46,2349.21 737.68,2400 665,2400 640,2375 640,2205 695,2150 735,2150 825,2060 1185,2060 1350,1895 2081.89,1895 U2.60@2229.74,1747.14 ; 744.78,2392.9 cw(c701.09,2349.21) P2.36@762.87,2349.21 ; 744.78,2392.9 cw(c701.09,2349.21) P2.36@762.87,2349.21 ; 744.78,2392.9 cw(c701.09,2349.21) P2.36@762.87,2349.21 ; 747.34,2390.33 ccw(c787.4,2430.39) P2.36@787.4,2373.74 ; 747.34,2390.33 ccw(c787.4,2430.39) P2.36@787.4,2373.74 ; 747.34,2390.33 ccw(c787.4,2430.39) P2.36@787.4,2373.74 ; 756.76,2372.04 ccw(c794.68,2382.2) P2.36@786.22,2343.87 ; 756.76,2372.04 ccw(c794.68,2382.2) P2.36@786.22,2343.87 ; 756.76,2372.04 ccw(c794.68,2382.2) P2.36@786.22,2343.87 ; 761.85,2375.83 cw(c735.23,2349.21) P2.36@772.87,2349.21 ; 761.85,2375.83 cw(c735.23,2349.21) P2.36@772.87,2349.21 ; 761.85,2375.83 cw(c735.23,2349.21) P2.36@772.87,2349.21 ; 764.42,2373.26 ccw(c787.4,2396.25) P2.36@787.4,2363.74 ; 764.42,2373.26 ccw(c787.4,2396.25) P2.36@787.4,2363.74 ; 764.42,2373.26 ccw(c787.4,2396.25) P2.36@787.4,2363.74 ; 765.54,2379.6 cw(c755.8,2343.25) P2.36@792.78,2350.23 ; 765.54,2379.6 cw(c755.8,2343.25) P2.36@792.78,2350.23 ; 765.54,2379.6 cw(c755.8,2343.25) P2.36@792.78,2350.23
FSMC_D3: P2.33 U2.59 | length 2797
  Top Layer w10: P2.33@887.4,2249.21 836.61,2300 765,2300 740,2275 740,2190 795,2135 829,2135 835,2141 835,2157.4 841,2163.4 849,2163.4 855,2157.4 855,2112.6 861,2106.6 869,2106.6 875,2112.6 875,2157.4 881,2163.4 889,2163.4 895,2157.4 895,2141 901,2135 925,2135 ; 925,2125 925,2135 ; U2.59@2243.66,1761.06 2089.72,1915 1360,1915 1185,2090 970,2090 925,2135 ; 845.53,2291.08 cw(c803.66,2249.21) P2.33@862.87,2249.21 ; 845.53,2291.08 ccw(c887.4,2332.95) P2.33@887.4,2273.74 ; 845.53,2291.08 cw(c803.66,2249.21) P2.33@862.87,2249.21 ; 845.53,2291.08 ccw(c887.4,2332.95) P2.33@887.4,2273.74 ; 845.53,2291.08 ccw(c887.4,2332.95) P2.33@887.4,2273.74 ; 845.53,2291.08 cw(c803.66,2249.21) P2.33@862.87,2249.21 ; 856.89,2271.56 ccw(c894.01,2281.51) P2.33@886.3,2243.85 ; 856.89,2271.56 ccw(c894.01,2281.51) P2.33@886.3,2243.85 ; 856.89,2271.56 ccw(c894.01,2281.51) P2.33@886.3,2243.85 ; 862.6,2274.01 cw(c837.8,2249.21) P2.33@872.87,2249.21 ; 862.6,2274.01 ccw(c887.4,2298.81) P2.33@887.4,2263.74 ; 862.6,2274.01 cw(c837.8,2249.21) P2.33@872.87,2249.21 ; 862.6,2274.01 ccw(c887.4,2298.81) P2.33@887.4,2263.74 ; 862.6,2274.01 ccw(c887.4,2298.81) P2.33@887.4,2263.74 ; 862.6,2274.01 cw(c837.8,2249.21) P2.33@872.87,2249.21 ; 865.05,2279.73 cw(c855.1,2242.6) P2.33@892.76,2250.31 ; 865.05,2279.73 cw(c855.1,2242.6) P2.33@892.76,2250.31 ; 865.05,2279.73 cw(c855.1,2242.6) P2.33@892.76,2250.31
FSMC_D4: P1.25 U2.108 | length 2469.9
  Top Layer w10: P1.25@1282.04,250.31 cw(c1319.7,242.6) 1309.75,279.73 ; P1.25@1287.4,249.21 1333.19,295 1905,295 1935,325 1935,360 1995,420 2135,420 2147.83,432.83 2147.83,441.31 2130.59,458.55 2130.59,467.03 2136.25,472.69 2144.74,472.69 2187.39,430.04 2195.87,430.04 2201.53,435.7 2201.53,444.18 2180.36,465.36 2158.88,486.83 2158.88,495.32 2164.54,500.97 2173.02,500.97 2194.5,479.5 2215.67,458.32 2224.16,458.32 2229.81,463.98 2229.81,472.47 2187.16,515.12 2187.16,523.6 2192.82,529.26 2201.3,529.26 2222.78,507.78 2243.95,486.61 2252.44,486.61 2258.1,492.27 2258.1,500.75 2241.17,517.68 2241.17,526.17 2315,600 2315,720 2340,745 2375,745 2515,885 2515,957.82 U2.108@2549.89,992.71 ; P1.25@1288.5,243.85 ccw(c1280.79,281.51) 1317.92,271.56 ; 1312.2,274.01 cw(c1287.4,298.81) 1287.4,263.74 ccw(c1287.4,298.81) 1312.2,274.01 ; 1312.2,274.01 ccw(c1337,249.21) 1301.93,249.21 cw(c1337,249.21) 1312.2,274.01 ; 1329.27,291.08 cw(c1287.4,332.95) 1287.4,273.74 ccw(c1287.4,332.95) 1329.27,291.08 ; 1329.27,291.08 ccw(c1371.14,249.21) 1311.93,249.21 cw(c1371.14,249.21) 1329.27,291.08
FSMC_D5: P1.26 U2.107 | length 2476.5
  Top Layer w10: P1.26@1282.04,350.31 cw(c1319.7,342.6) 1309.75,379.73 ; P1.26@1287.4,349.21 1378.19,440 1905,440 1980,515 2065,515 2065,520 2085,540 2120,540 2132.83,552.83 2132.83,561.31 2113.03,581.11 2113.03,589.6 2118.69,595.25 2127.17,595.25 2146.97,575.46 2155.46,575.46 2161.11,581.11 2161.11,589.6 2141.31,609.4 2141.31,617.88 2146.97,623.54 2155.46,623.54 2179.5,599.5 2203.54,575.46 2212.02,575.46 2217.68,581.11 2217.68,589.6 2169.6,637.68 2169.6,646.17 2175.25,651.82 2183.74,651.82 2207.78,627.78 2231.82,603.74 2240.31,603.74 2245.97,609.4 2245.97,617.88 2197.88,665.97 2197.88,674.45 2203.54,680.11 2212.02,680.11 2260.11,632.02 2268.59,632.02 2274.25,637.68 2274.25,646.17 2254.45,665.97 2254.45,674.45 2270,690 2270,770 2336,836 2412.77,836 2458.38,881.62 2458.38,928.19 2535.97,1005.78 U2.107@2535.97,1006.63 ; P1.26@1288.5,343.85 ccw(c1280.79,381.51) 1317.92,371.56 ; 1312.2,374.01 cw(c1287.4,398.81) 1287.4,363.74 ccw(c1287.4,398.81) 1312.2,374.01 ; 1312.2,374.01 ccw(c1337,349.21) 1301.93,349.21 cw(c1337,349.21) 1312.2,374.01 ; 1329.27,391.08 cw(c1287.4,432.95) 1287.4,373.74 ccw(c1287.4,432.95) 1329.27,391.08 ; 1329.27,391.08 ccw(c1371.14,349.21) 1311.93,349.21 cw(c1371.14,349.21) 1329.27,391.08
FSMC_D6: P1.27 U2.105 | length 2478.7
  Top Layer w10: P1.27@1182.04,250.31 cw(c1219.7,242.6) 1209.75,279.73 ; P1.27@1187.4,249.21 1235,296.81 1235,365 1330,460 1670,460 1705,495 1729,495 1735,489 1735,466.13 1741,460.13 1749,460.13 1755,466.13 1755,518.87 1761,524.87 1769,524.87 1775,518.87 1775,466.13 1781,460.13 1789,460.13 1795,466.13 1795,518.87 1801,524.87 1809,524.87 1815,518.87 1815,466.13 1821,460.13 1829,460.13 1835,466.13 1835,518.87 1841,524.87 1849,524.87 1855,518.87 1855,466.13 1861,460.13 1869,460.13 1875,466.13 1875,489 1881,495 1930,495 1970,535 2025,535 2245,755 2245,771.34 U2.105@2508.13,1034.47 ; P1.27@1188.5,243.85 ccw(c1180.79,281.51) 1217.92,271.56 ; 1212.2,274.01 cw(c1187.4,298.81) 1187.4,263.74 ccw(c1187.4,298.81) 1212.2,274.01 ; 1212.2,274.01 ccw(c1237,249.21) 1201.93,249.21 cw(c1237,249.21) 1212.2,274.01 ; 1229.27,291.08 cw(c1187.4,332.95) 1187.4,273.74 ccw(c1187.4,332.95) 1229.27,291.08 ; 1229.27,291.08 ccw(c1271.14,249.21) 1211.93,249.21 cw(c1271.14,249.21) 1229.27,291.08
FSMC_D7: P1.28 U2.104 | length 2435.1
  Top Layer w10: P1.28@1187.4,349.21 1180,356.61 1180,430 1225,475 1320,475 1329,484 1454,484 1490,520 1519,520 1525,514 1525,487.8 1531,481.8 1539,481.8 1545,487.8 1545,546.2 1551,552.2 1559,552.2 1565,546.2 1565,487.8 1571,481.8 1579,481.8 1585,487.8 1585,546.2 1591,552.2 1599,552.2 1605,546.2 1605,487.8 1611,481.8 1619,481.8 1625,487.8 1625,546.2 1631,552.2 1639,552.2 1645,546.2 1645,487.8 1651,481.8 1659,481.8 1665,487.8 1665,515 1670,520 1689.25,520 1714.25,545 1945,545 1960,560 2005.82,560 U2.104@2494.21,1048.39 ; P1.28@1170.06,366.56 ccw(c1146.05,390.56) 1180,390.56 cw(c1146.05,390.56) P1.28@1170.06,366.56 ; 1180,378.01 ccw(c1216.2,378.01) 1190.6,352.41 cw(c1216.2,378.01) 1180,378.01 ; 1180,402.15 ccw(c1240.34,402.15) 1197.67,359.48 cw(c1240.34,402.15) 1180,402.15 ; 1180,426.29 ccw(c1264.48,426.29) 1204.74,366.56 cw(c1264.48,426.29) 1180,426.29
FSMC_D8: P1.29 U2.103 | length 2407.1
  Top Layer w10: P1.29@1082.04,250.31 cw(c1119.7,242.6) 1109.75,279.73 ; P1.29@1087.4,249.21 1135,296.81 1135,440 1195,500 1315,500 1355,540 1379,540 1385,534 1385,509.77 1391,503.77 1399,503.77 1405,509.77 1405,569.23 1411,575.23 1419,575.23 1425,569.23 1425,509.77 1431,503.77 1439,503.77 1445,509.77 1445,569.23 1451,575.23 1459,575.23 1464.23,570 1935,570 1945,580 1997.99,580 U2.103@2480.29,1062.31 ; P1.29@1088.5,243.85 ccw(c1080.79,281.51) 1117.92,271.56 ; 1112.2,274.01 cw(c1087.4,298.81) 1087.4,263.74 ccw(c1087.4,298.81) 1112.2,274.01 ; 1112.2,274.01 ccw(c1137,249.21) 1101.93,249.21 cw(c1137,249.21) 1112.2,274.01 ; 1129.27,291.08 cw(c1087.4,332.95) 1087.4,273.74 ccw(c1087.4,332.95) 1129.27,291.08 ; 1129.27,291.08 ccw(c1171.14,249.21) 1111.93,249.21 cw(c1171.14,249.21) 1129.27,291.08